# Altium PCB 单片机供电.PcbDoc
Units mil, origin at the board's own origin, x right, y up, seen from the top; angles counter-clockwise.
Board outline 3118.03 x 2088.03 mil, 2 copper layers (Top Layer, Bottom Layer); 28 components, 7 nets, 60 pads, 0 vias.
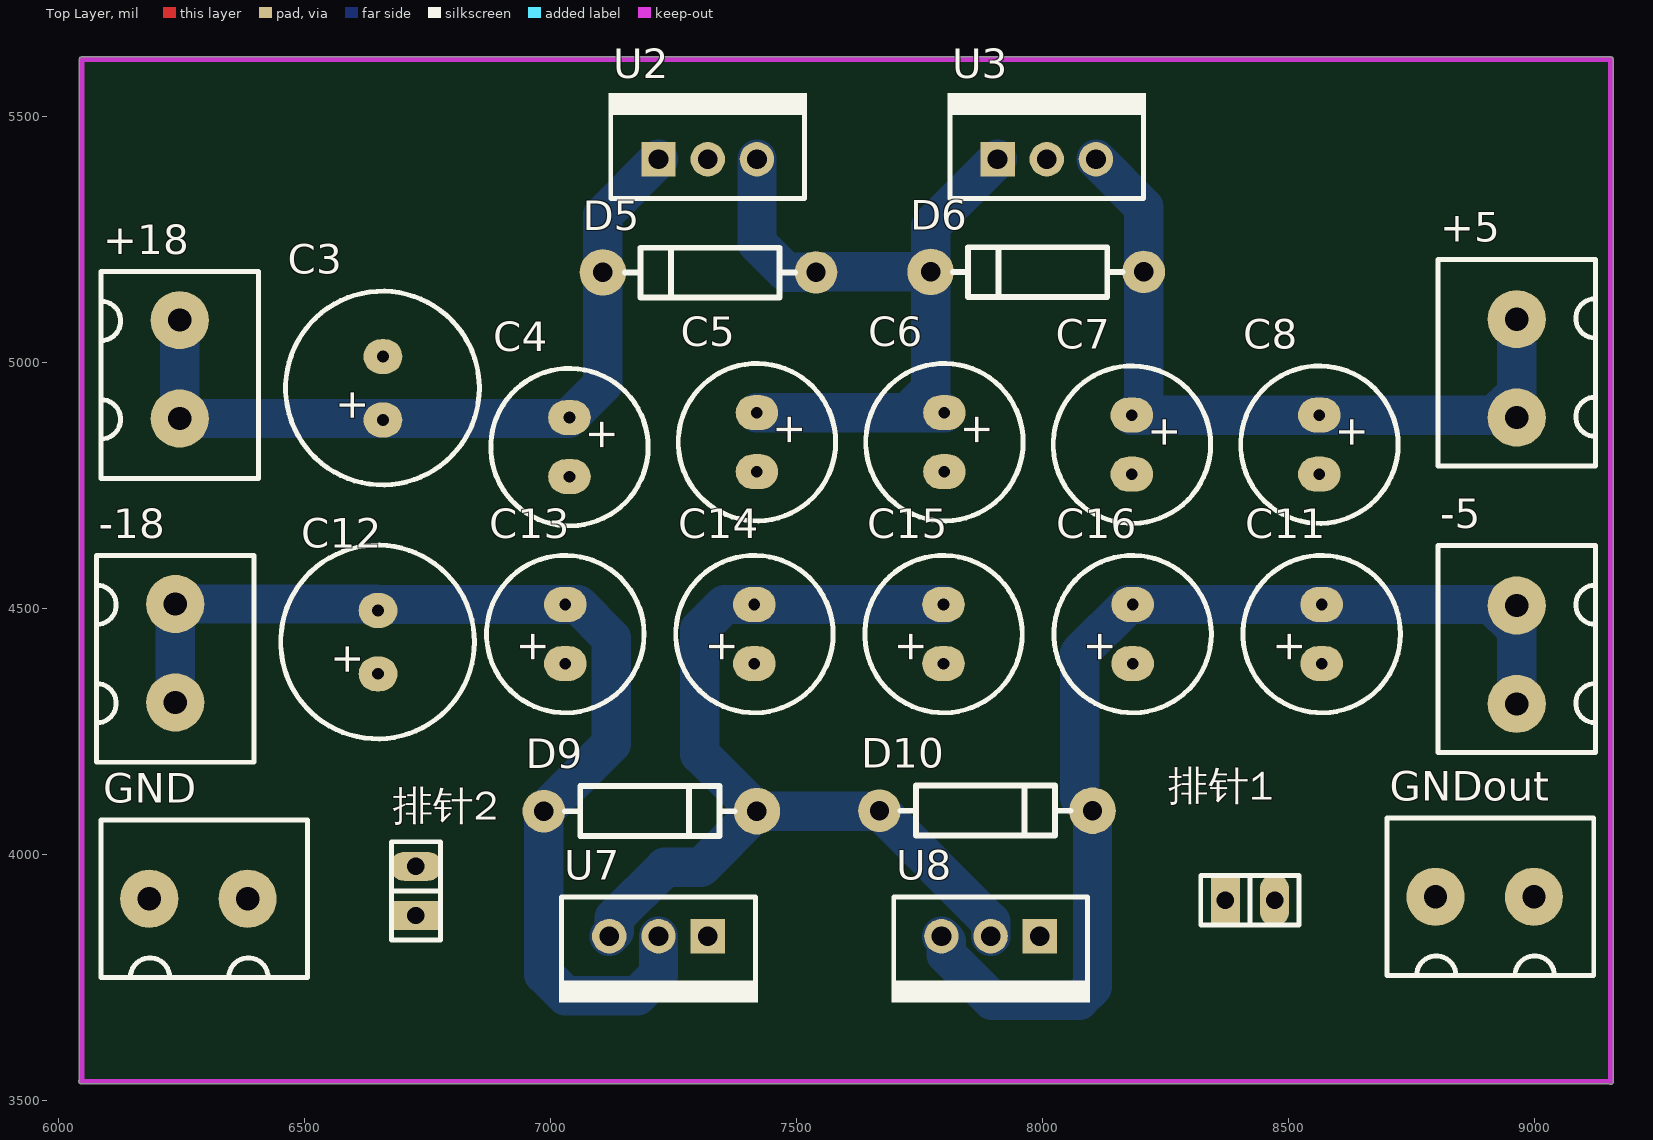
[diagram p0: Top Layer view]
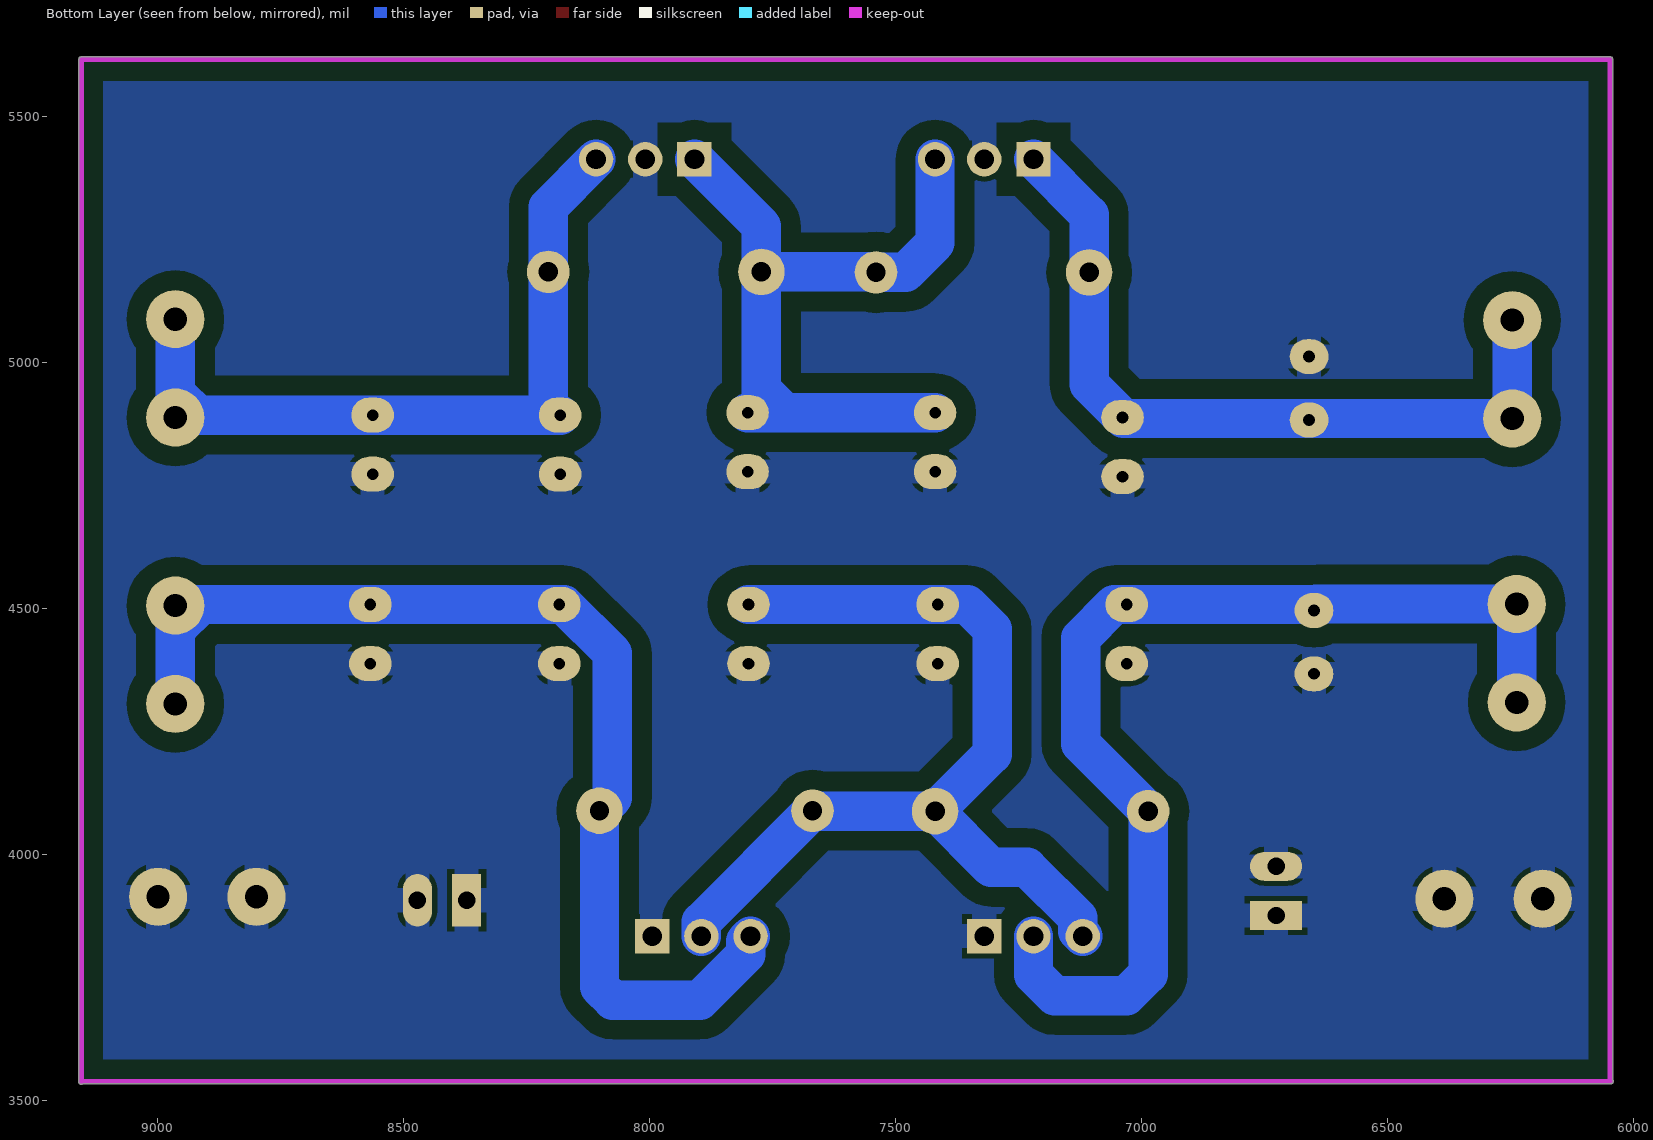
[diagram p1: Bottom Layer view, seen from below]

## Layer stack, top to bottom
Top Layer: signal copper 1.4
Dielectric: dielectric 12.6, FR-4, Dk 4.8
Bottom Layer: signal copper 1.4

## Board outline
6046,3533.99 cw(c6046,3539) 6041.98,3542.01 6041.98,5616 cw(c6047,5616) 6047,5621.02 9154,5621.02 cw(c9154,5616) 9159.01,5616 9159.01,3538 cw(c9154,3538) 9151,3533.99

## Design rules (kind name [scope] priority, off if disabled: settings)
Clearance [All] p1: gap=10
PolygonConnect [All] p1: connectstyle=Relief reliefconductorwidth=50 reliefentries=4 polygonreliefangle="90 Angle" airgapwidth=10
RoutingVias [All] p1: holewidth=28 width=50 viastyle="Through Hole" minholewidth=28 minwidth=50 maxholewidth=28 maxwidth=50
SolderMaskExpansion [All] p1: expansion=4
Width [All] p1: maxlimit=80 minlimit=10 preferedwidth=80 toplayer_maxwidth=10 toplayer_prefwidth=10 bottomlayer_minwidth=80 minimp=50.000000 maximp=50.000000 favimp=50.000000
28 further rules are at their usual default settings.

## Components (designator, comment, footprint, x,y, rotation, side; value= is the part's Value field where it differs from the comment)
+5 "CON2" 2P-200 8963,5088 r270 top
+18 "CON2" 2P-200 6246,4886 r90 top
-5 "CON2" 2P-200 8963,4506 r270 top
-18 "CON2" 2P-200 6237,4309 r90 top
C3 "470" CAO5 6658,4884 r90 top
C4 "220" CAO4 7038,4888 r270 top
C5 "220" CAO4 7419,4898 r270 top
C6 "220" CAO4 7800,4898 r270 top
C7 "100" CAO4 8181,4893 r270 top
C8 "100" CAO4 8562,4893 r270 top
C11 "100." CAO4 8566.71,4388 r90 top
C12 "470" CAO5 6648,4368 r90 top
C13 "220" CAO4 7029.57,4388 r90 top
C14 "220" CAO4 7413.86,4388 r90 top
C15 "220" CAO4 7798.14,4388 r90 top
C16 "100" CAO4 8182.43,4388 r90 top
D5 "DIODE" DIODE0.4 7539,5183 r180 top
D6 "DIODE" DIODE0.4 8205,5184 r180 top
D9 "DIODE" DIODE0.4 6986,4088 r0 top
D10 "DIODE" DIODE0.4 7668,4089 r0 top
GND "CON2" 2P-200 6384,3910 r180 top
GNDout "CON2" 2P-200 8998,3914 r180 top
U2 "7812" TO-220 7219,5413 r0 top
U3 "7805" TO-220 7908,5413 r0 top
U7 "7912" TO-220 7319,3834 r180 top
U8 "7905" TO-220 7994,3834 r180 top
排针1 "CON2" sip-2 8371,3907 r0 top
排针2 "CON2" sip-2 6726,3876 r90 top

## Footprints (in the part's own frame and the unit in brackets; to place one, negate y for a bottom-side part, rotate by r counter-clockwise, add the part's x,y. Pads: shape width x height; smd on the part's side, far side on the other; paste and mask are expansions set on the pad)
2P-200 [mm]
  round 3 hole 1.2: 1(0,0) 2(5.08,0)
  silkscreen extent -3.09,-4.06 7.58,4.06
CAO4 [mm]
  oval 1.8x2.2 hole 0.6: 1(0,0) 2(3.048,0)
  silkscreen extent -2.54,-4.06 5.59,4.06
CAO5 [mm]
  oval 1.8x2 hole 0.6: 1(-0.025,-0.025) 2(3.25,-0.025)
  silkscreen extent -3.37,-5 6.62,5
DIODE0.4 [mm]
  round 2.2 hole 1: 1(0,0)
  round 2.4 hole 1 unplated: 2(10.998,0)
  silkscreen extent 1.09,-1.27 9.86,1.3
sip-2 [mm]
  rect 1.5x2.7 hole 0.9: 1(0,0)
  oval 1.5x2.7 hole 0.9: 2(2.54,0)
  silkscreen extent -1.27,-1.27 3.81,1.27
TO-220 [mil]
  rect 70x70 hole 40: 1(0,0)
  round 70 hole 40: 2(100,0) 3(200,0)
  silkscreen extent -102,-80 302,135

## Part data
+5 +18 -5 -18 GND GNDout 排针1 排针2: "Connector"
C3 C4 C5 C6 C7 C8 C11 C12 C13 C14 C15 C16: library part CAP3
U2 U3: library part 78LXX, "3-Terminal Positive Voltage Regulator"
U7 U8: library part 79LXX

## Nets (pads, with @x,y where several pads share a name; then routed paths per layer and width w, separated by ;. In a path a pad name is that pad's centre, name@x,y a point inside that pad or via, vN(x,y) a via of type N, cw(c..) or ccw(c..) an arc to the next point about the centre after c; other vN are vias at no path point)
5: +5.1 +5.2 C7.1 C8.1 D6.1 U3.3 | length 1564.3
  Bottom Layer w80: U3.3 8205,5316 D6.1 C7.1@8205,4917 ; C7.1 C8.1 8946,4893 8950,4897 +5.2@8950,4889 ; +5.2@8920,4896 +5.2@8955,4931 ; +5.2 +5.1
+18: +18.1 +18.2 C3.1 C4.1 D5.2 U2.1 | length 1590
  Bottom Layer w80: +18.2 +18.1 C4.1@7036,4886 ; C4.1 7106,4956 D5.2 7106,5300 U2.1
-5: -5.1 -5.2 C11.2 C16.2 D10.2 U8.3 | length 2256.3
  Bottom Layer w80: U8.3 7804,3824 7804,3796.72 7896.72,3704 8074,3704 8101,3731 D10.2 8075,4115 8075,4409.27 8173.73,4508 C16.2 C11.2 8961,4508 -5.1 -5.2 ; -5.1@8919,4500 -5.1@8954,4465
-18: -18.1 -18.2 C12.2 C13.2 D9.1 U7.2 | length 2199.8
  Bottom Layer w80: -18.1 -18.2 C12.2@6644.29,4509 ; C12.2@6645.29,4508 C13.2 7055,4508 7122.88,4440.12 7122.88,4224.88 D9.1 6986,3757 7030,3713 7176,3713 7219,3756 U7.2
GND: C3.2 C4.2 C5.2 C6.2 C7.2 C8.2 C11.1 C12.1 C13.1 C14.1 C15.1 C16.1 GND.1 GND.2 GNDout.1 GNDout.2 U2.2 U3.2 U7.1 U8.1 排针1.1 排针1.2 排针2.1 排针2.2
NetC5_1: C5.1 C6.1 D5.1 D6.2 U2.3 U3.1 | length 1520.7
  Bottom Layer w80: C5.1 C6.1 ; U2.3 7419,5243 7479,5183 D5.1 ; D5.1@7540,5184 D6.2 ; 7729,4902 7764,4937 ; C6.1@7772,4926 D6.2 ; U3.1 7772,5277 D6.2
NetC14_2: C14.2 C15.2 D9.2 D10.1 U7.3 U8.2 | length 1951.7
  Bottom Layer w80: U7.3 7129,3844 7129,3871.28 7231.72,3974 7305,3974 D9.2 ; D10.1@7667,4088 D9.2 ; D10.1 7894,3863 U8.2 ; C15.2 C14.2 7353,4508 7303,4458 7303,4204 D9.2

## Polygon pours and split planes (outlines as drawn)
GND on Bottom Layer "GND" (solid, remove dead copper, pour order 2): 6049.37,5634 9142.82,5634 9147.91,5628.66 9153,5623.32 9153,3523 6034.09,3523 6029,3528.34

## Keep-outs
Keep-Out Layer:
  lines w10: 6046,3539 6047,3540 6047,5616 9154,5616 9154,3538 9153,3539 6046,3539

## Text inside footprints (layer, text, board x,y; h text height)
C3: Top Overlay "+" at 6622.57,4878.09 h60 r90
C4: Top Overlay "+" at 7078,4888 h60 r270
C5: Top Overlay "+" at 7459,4898 h60 r270
C6: Top Overlay "+" at 7840,4898 h60 r270
C7: Top Overlay "+" at 8221,4893 h60 r270
C8: Top Overlay "+" at 8602,4893 h60 r270
C11: Top Overlay "+" at 8526.71,4388 h60 r90
C12: Top Overlay "+" at 6612.57,4362.09 h60 r90
C13: Top Overlay "+" at 6989.57,4388 h60 r90
C14: Top Overlay "+" at 7373.86,4388 h60 r90
C15: Top Overlay "+" at 7758.14,4388 h60 r90
C16: Top Overlay "+" at 8142.43,4388 h60 r90